# EAGLE board uni_supp (EAGLE 6.6.0)
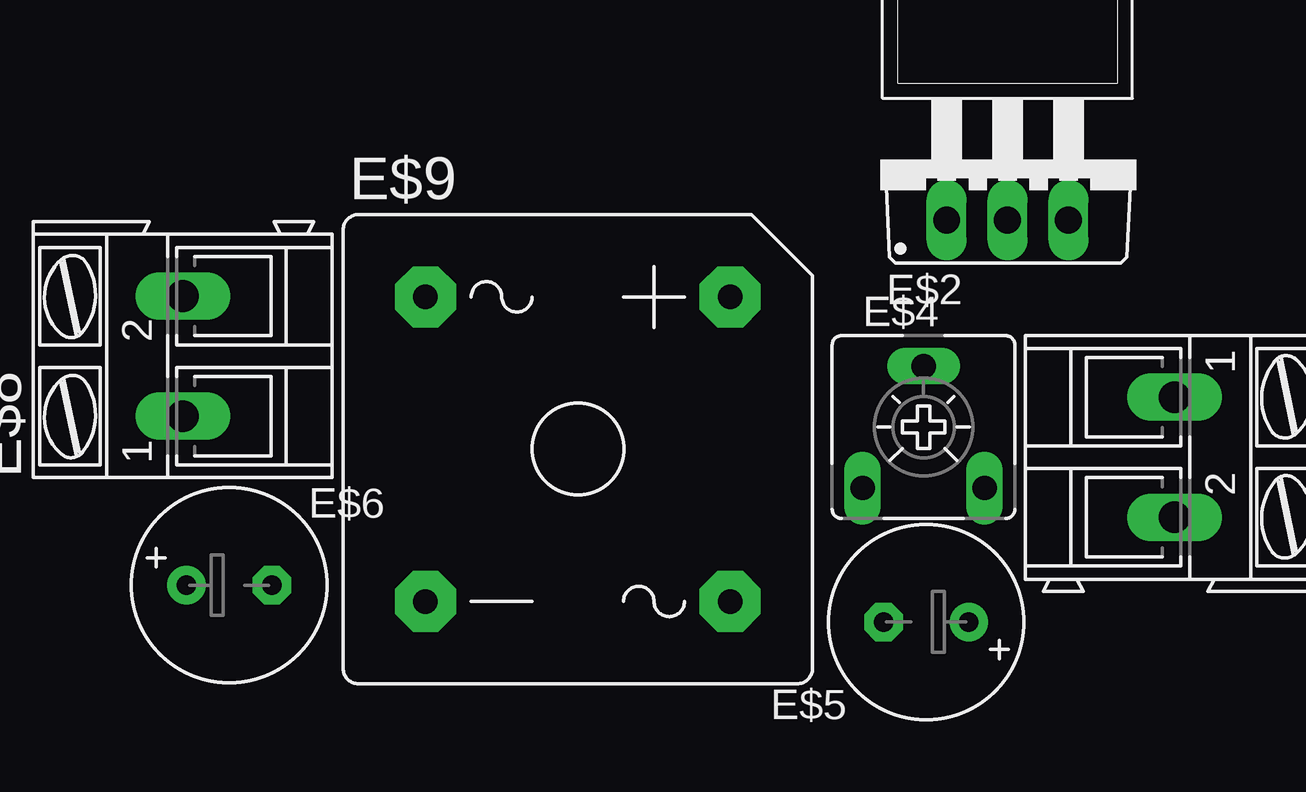
[diagram p0: board, top side]
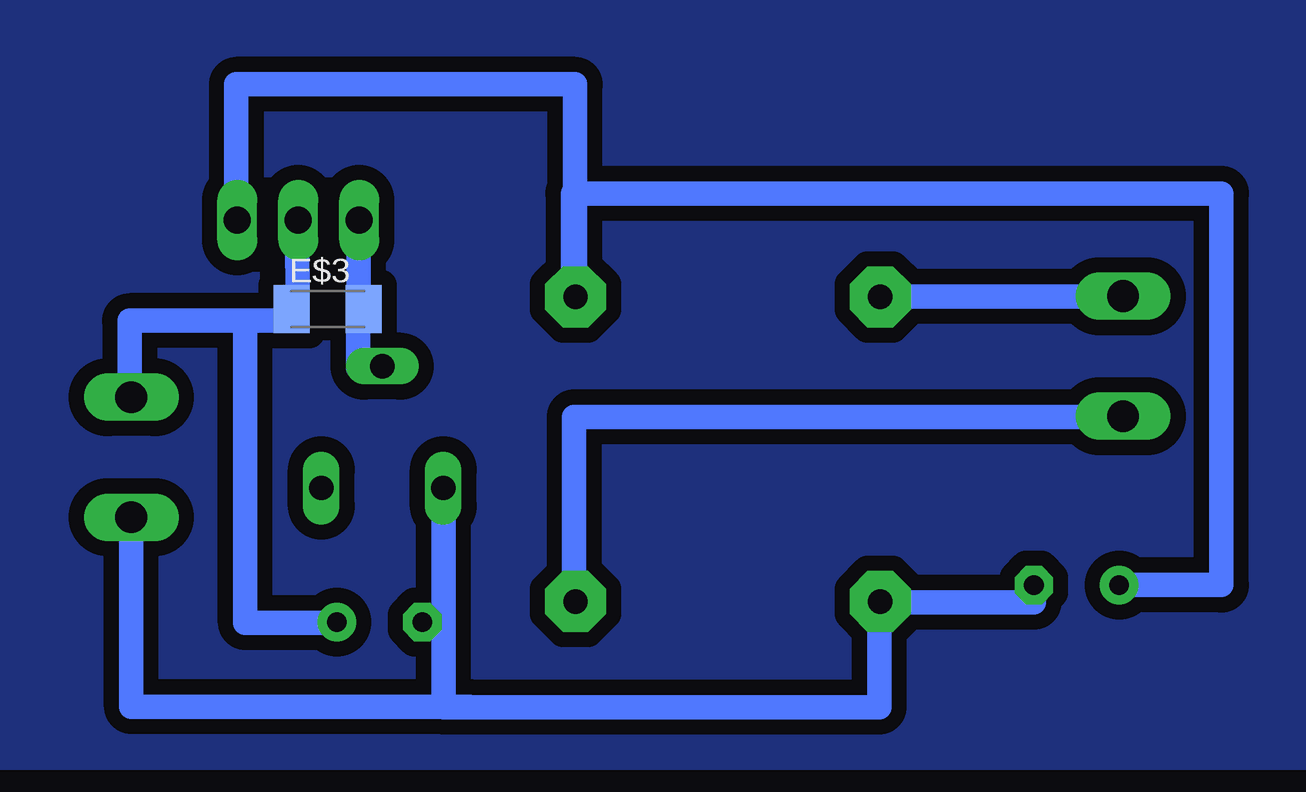
[diagram p1: board, bottom side, seen from below]

No outline drawn. Coordinates in mm, seen from the top.
Copper layers (1*16): Top 0.035mm / dielectric 1.5mm / Bottom 0.035mm
Design rules "default *": minimum track width 10mil, minimum drill 24mil, track to track 25mil, track to pad 25mil, pad to pad 25mil, via to via 25mil, smd to smd 25mil, copper to edge 40mil, drill to drill 8mil, minimum pad ring 10mil, minimum via ring 8mil, stop-mask expansion 4mil, vias tented up to drill 0mil, thermal gap 10mil

## Footprints (pad centres in the part's own frame; a part is rotated, then mirrored left to right if it is on the bottom)
TO220 = drill 1.118 long: 1 -2.54,-6.35; 2 0,-6.35; 3 2.54,-6.35 | hole 3.302: 0,11.176
TO220V = drill 1.016 long: 1 -2.54,-2.54; 2 0,-2.54; 3 2.54,-2.54
C1206K = smd 1.5 x 2: 1 -1.5,0; 2 1.5,0
CA6V = drill 1.016 long: A -2.54,-2.54; E 2.54,-2.54; S 0,2.54
E3,5-8 = drill 0.813 pad 1.6: + -1.778,0 | drill 0.813 pad 1.6 octagon: - 1.778,0
AK300/2 = drill 1.321 long: 1 -2.515,0; 2 2.489,0
GBPC8 = drill 1.016 pad 2.54 octagon: + 6.35,6.35; - -6.35,-6.35; AC1 -6.35,6.35; AC2 6.35,-6.35

## Placement (x,y rotation side)
E$1  [TO220]  42.24,29.08 0 top
E$2  [TO220V]  42.27,25.25 0 top
E$3  [C1206K]  41.02,19.02 0 bottom
E$4  [CA6V]  38.74,14.1 0 top
E$5  [E3,5-8]  38.85,5.97 180 top
E$6  [E3,5-8]  9.8,7.51 0 top
E$7  [AK300/2]  49.2,12.83 270 top
E$8  [AK300/2]  7.86,17.07 90 top
E$9  [GBPC8]  24.33,13.18 0 top

## Library data of the parts
E$1 = ref-packages
E$2 = transistor-pnp
E$3 E$5 E$6 = rcl
E$4 = pot
E$7 E$8 = con-ptr500
E$9 = rectifier

## Tracks (layer width: path | path; a pad name or v marks a point on that pad's centre or on a via)
S$1
  Bottom 1.016: 7.91,19.55 18.03,19.55
S$2
  Bottom 1.016: 7.86,14.53 30.74,14.53 30.74,6.73
S$3
  Bottom 1.016: 30.79,19.5 30.79,23.84 3.76,23.84 3.76,7.52 8.12,7.52
S$4
  Bottom 1.016: 11.57,7.5 11.57,6.8 18.09,6.8
S$5
  Bottom 1.016: 30.7,19.65 30.7,28.39 44.82,28.39 44.82,22.62
S$6
  Bottom 1.016: 42.27,18.66 42.29,22.75
S$7
  Bottom 1.016: 38.55,16.56 39.74,16.56 39.74,18.61
S$8
  Bottom 1.016: 18.02,6.91 18.02,2.42 36.18,2.42 36.18,10.81
S$9
  Bottom 1.016: 49.27,15.32 49.27,18.54 42.51,18.54
S$10
  Bottom 1.016: 39.73,18.56 39.73,22.81
S$11
  Bottom 1.016: 40.62,5.94 44.45,5.94 44.45,18.38
S$12
  Bottom 1.016: 35.09,2.44 49.2,2.44 49.2,10.46
S$13
  pour Bottom: 0,0 55.18,0 55.18,46.1 0,46.1